# Altium PCB PCB1.PcbDoc
Units mm, origin at the board's own origin, x right, y up, seen from the top; angles counter-clockwise.
Board outline 59.94 x 64.9 mm, 2 copper layers (Top Layer, Bottom Layer); 20 components, 15 nets, 104 pads, 4 vias.
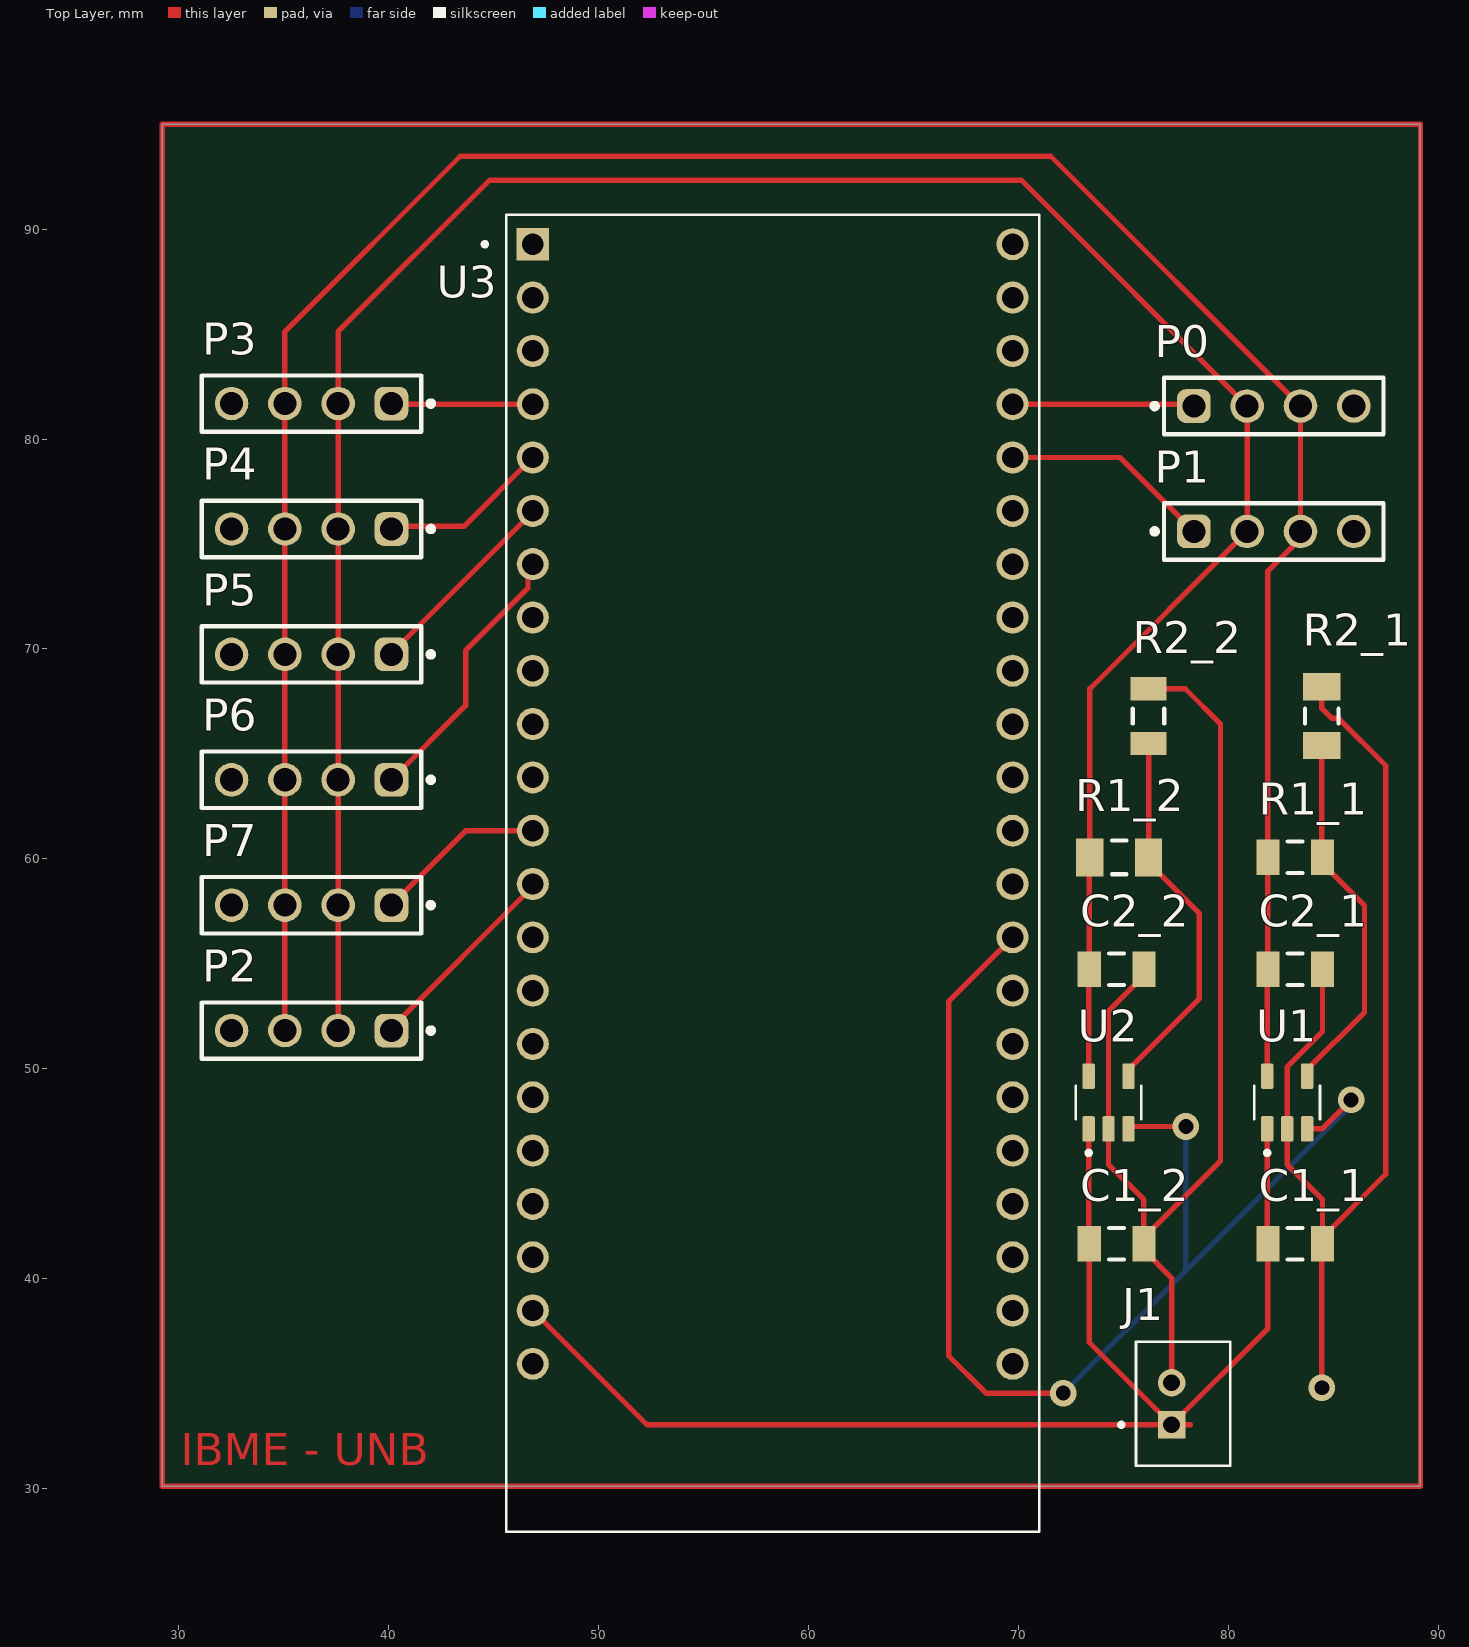
[diagram p0: Top Layer view]
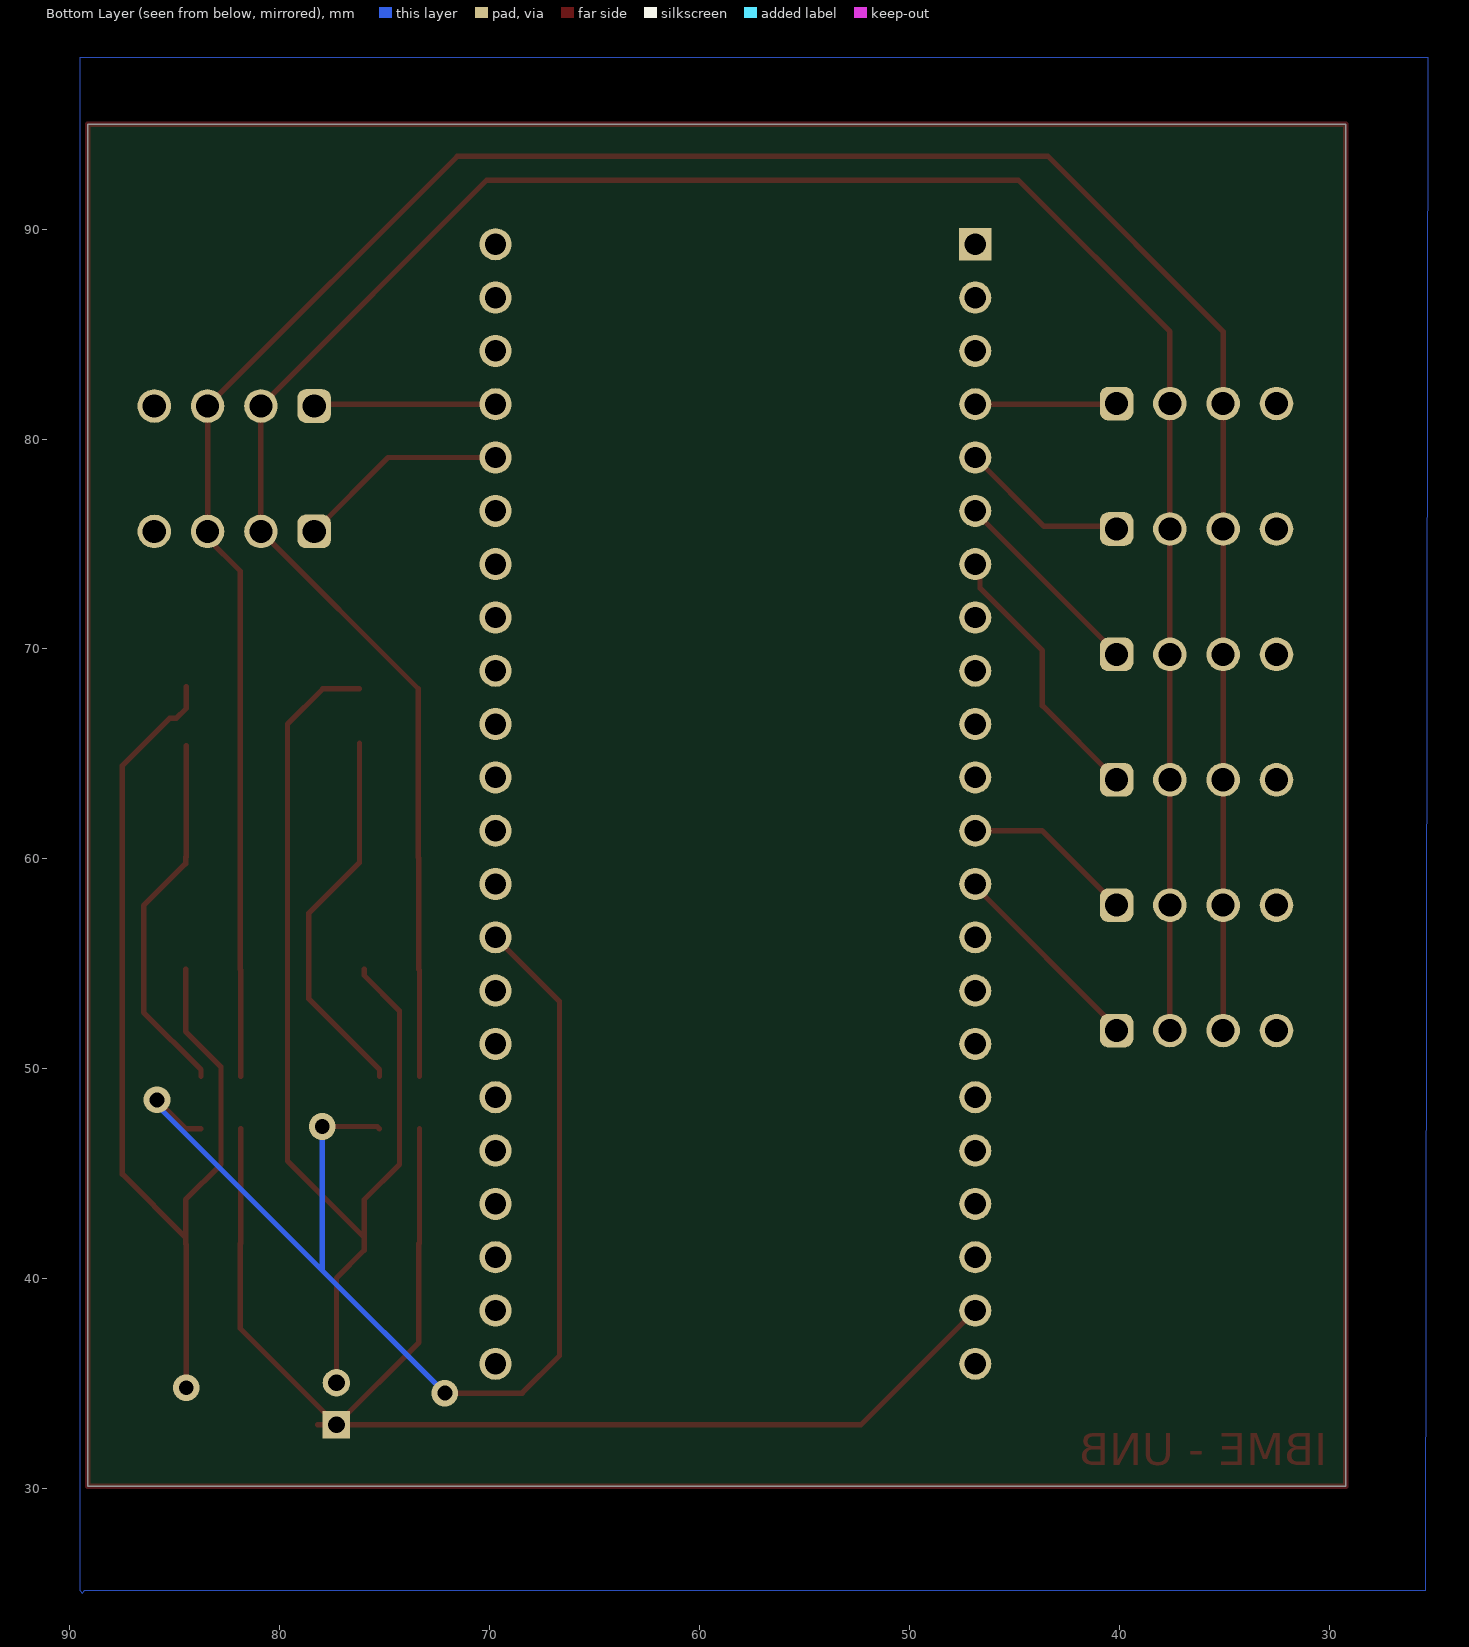
[diagram p1: Bottom Layer view, seen from below]
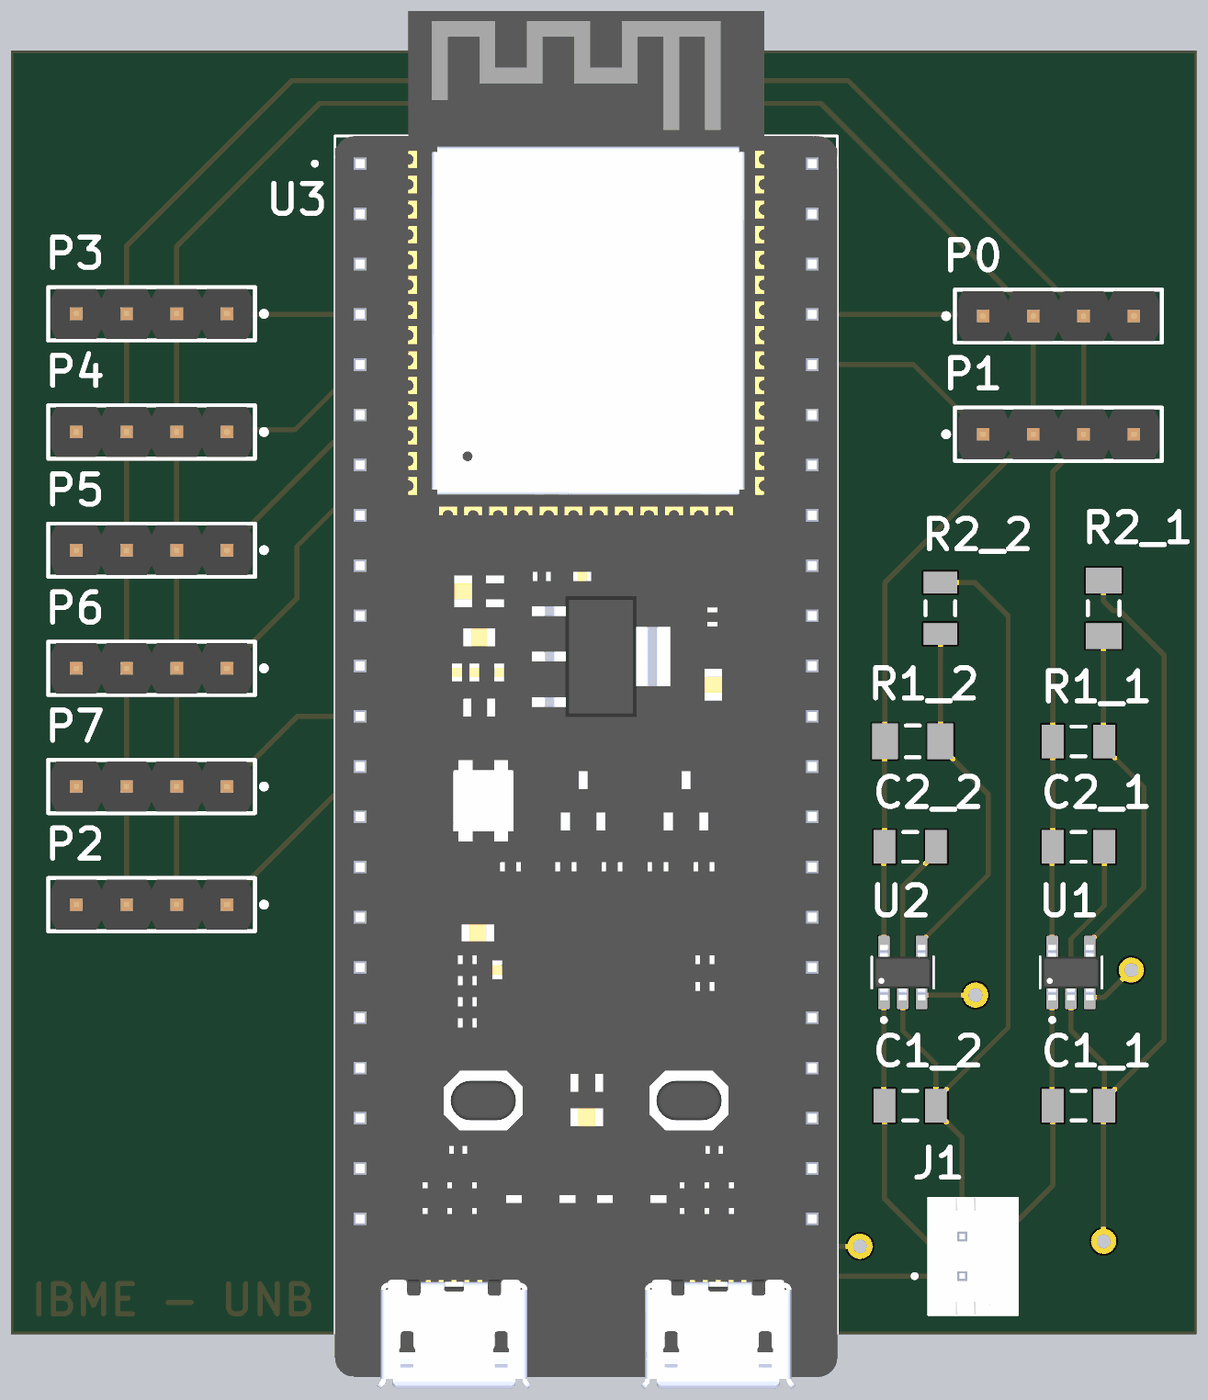
[diagram p2: 3D render of the assembled board from above, using the file's embedded part models]

## Layer stack, top to bottom
Top Solder: solder mask 0.0102, Solder Resist, Dk 3.5
Top Layer: signal copper 0.0356
Dielectric 1: dielectric 0.32, FR-4, Dk 4.8
Bottom Layer: signal copper 0.0356
Bottom Solder: solder mask 0.0102, Solder Resist, Dk 3.5

## Board outline
29.21,30.099 29.21,94.996 89.154,94.996 89.154,30.099

## Design rules (kind name [scope] priority, off if disabled: settings)
Clearance [All] p1: gap=0.254 ignorepadtopadclearanceinfootprint=FALSE
PolygonConnect [All] p1: connectstyle=Relief reliefconductorwidth=0.254 reliefentries=4 polygonreliefangle="90 Angle" airgapwidth=0.254
RoutingVias [All] p1: holewidth=0.711 width=1.27 viastyle="Through Hole" minholewidth=0.711 minwidth=1.27 maxholewidth=0.711 maxwidth=1.27
SolderMaskExpansion [All] p1: expansion=0.102 istentingtop=FALSE
SupplyNets "Schematic Supply Nets_5" [InNet('3.4V')] p1: voltage=0.000
SupplyNets "Schematic Supply Nets_4" [InNet('1.6V')] p2: voltage=0.000
SupplyNets "Schematic Supply Nets_1" [InNet('3.7V')] p3: voltage=0.000
SupplyNets "Schematic Supply Nets" [InNet('GND')] p4: voltage=0.000
Width [All] p1: maxlimit=0.254 minlimit=0.254 preferedwidth=0.254
30 further rules are at their usual default settings.

## Components (designator, comment, footprint, x,y, rotation, side; value= is the part's Value field where it differs from the comment)
C1_1 "1uF" CAPC3216X110X50LL20T25 83.185,41.656 r180 top
C1_2 "1uF" CAPC3216X110X50LL20T25 74.676,41.656 r180 top
C2_1 "1uF" CAPC3216X110X50LL20T25 83.185,54.737 r0 top
C2_2 "1uF" CAPC3216X110X50LL20T25 74.676,54.737 r180 top
J1 "B2B-PH-K-S(LF)(SN)" JST_B2B-PH-K-S(LF)(SN) 77.851,34.036 r270 top
P0 "61300411121" 61300411121 82.169,81.572 r0 top
P1 "61300411121" 61300411121 82.169,75.598 r0 top
P2 "61300411121" 61300411121 36.322,51.816 r180 top
P3 "61300411121" 61300411121 36.322,81.688 r180 top
P4 "61300411121" 61300411121 36.322,75.714 r180 top
P5 "61300411121" 61300411121 36.322,69.739 r180 top
P6 "61300411121" 61300411121 36.322,63.765 r180 top
P7 "61300411121" 61300411121 36.322,57.79 r180 top
R1_1 "62k" RESC3216X70X50LL20T25 83.185,60.071 r180 top
R1_2 "82k" RESC3216X70X50NL20T25 74.803,60.069 r180 top
R2_1 "12k" RESC3216X70X50NL20T25 84.455,66.802 r270 top
R2_2 "43k" RESC3216X70X50LL20T25 76.2,66.802 r270 top
U1 "TLV75801PDBVR" SOT95P280X145-5N 82.804,48.387 r90 top
U2 "TLV75801PDBVR" SOT95P280X145-5N 74.295,48.387 r90 top
U3 "ESP32-S3-DEVKITC-1-N8R2" XCVR_ESP32-S3-DEVKITC-1-N8R2 58.293,59.309 r0 top

## Footprints (in the part's own frame and the unit in brackets; to place one, negate y for a bottom-side part, rotate by r counter-clockwise, add the part's x,y. Pads: shape width x height; smd on the part's side, far side on the other; paste and mask are expansions set on the pad)
61300411121 [mm] "Pin Header, pitch 2.54 mm, THT, Vertical, single row, 4p"
  rrect50% 1.6x1.6 hole 1.1: 1(-3.81,0)
  round 1.6 hole 1.1: 2(-1.27,0) 3(1.27,0) 4(3.81,0)
  silkscreen extent -5.8,-1.35 5.23,1.35, body extent -5.08,-1.27 5.08,1.27, height 8.57
CAPC3216X110X50LL20T25 [mm] "Chip Capacitor, 2-Leads, Body 3.20x1.60mm, IPC High Density"
  rect 1.1x1.7 smd: 1(-1.3,0) 2(1.3,0)
  silkscreen extent -0.35,-0.75 0.35,0.75, body extent -1.7,-0.9 1.7,0.9, height 1.1
JST_B2B-PH-K-S(LF)(SN) [mm]
  rect 1.308x1.308 / inner round 1.308 / far side rect 1.308x1.308 hole 0.8: 1(1,-0.55)
  round 1.308 hole 0.8: 2(-1,-0.55)
  silkscreen extent -2.95,-3.05 2.95,2.25, body extent -2.95,-2.25 2.95,2.25, height 6
RESC3216X70X50LL20T25 [mm] "Chip Resistor, 2-Leads, Body 3.20x1.60mm, IPC High Density"
  rect 1.1x1.7 smd: 1(-1.3,0) 2(1.3,0)
  silkscreen extent -0.35,-0.75 0.35,0.75, body extent -1.7,-0.9 1.7,0.9, height 0.7
RESC3216X70X50NL20T25 [mm] "Chip Resistor, 2-Leads, Body 3.20x1.60mm, IPC Medium Density"
  rect 1.3x1.8 smd: 1(-1.4,0) 2(1.4,0)
  silkscreen extent -0.35,-0.8 0.35,0.8, body extent -1.7,-0.9 1.7,0.9, height 0.7
SOT95P280X145-5N [mm]
  rrect25% 1.21x0.59 smd mask+0.05: 1(-1.255,0.95) 2(-1.255,0) 3(-1.255,-0.95) 4(1.255,-0.95) 5(1.255,0.95)
  silkscreen extent -2.5,-1.57 0.8,1.57, body extent -1.4,-1.45 1.4,1.45, height 1.45
XCVR_ESP32-S3-DEVKITC-1-N8R2 [mm]
  rect 1.53x1.53 / inner round 1.53 / far side rect 1.53x1.53 hole 1.02: J1_1(-11.43,29.97)
  round 1.53 hole 1.02: J1_2(-11.43,27.43) J1_3(-11.43,24.89) J1_4(-11.43,22.35) J1_5(-11.43,19.81) J1_6(-11.43,17.27) J1_7(-11.43,14.73) J1_8(-11.43,12.19) J1_9(-11.43,9.65) J1_10(-11.43,7.11) J1_11(-11.43,4.57) J1_12(-11.43,2.03) J1_13(-11.43,-0.51) J1_14(-11.43,-3.05) J1_15(-11.43,-5.59) J1_16(-11.43,-8.13) J1_17(-11.43,-10.67) J1_18(-11.43,-13.21) J1_19(-11.43,-15.75) J1_20(-11.43,-18.29) J1_21(-11.43,-20.83) J1_22(-11.43,-23.37) J3_1(11.43,29.97) J3_2(11.43,27.43) J3_3(11.43,24.89) J3_4(11.43,22.35) J3_5(11.43,19.81) J3_6(11.43,17.27) J3_7(11.43,14.73) J3_8(11.43,12.19) J3_9(11.43,9.65) J3_10(11.43,7.11) J3_11(11.43,4.57) J3_12(11.43,2.03) J3_13(11.43,-0.51) J3_14(11.43,-3.05) J3_15(11.43,-5.59) J3_16(11.43,-8.13) J3_17(11.43,-10.67) J3_18(11.43,-13.21) J3_19(11.43,-15.75) J3_20(11.43,-18.29) J3_21(11.43,-20.83) J3_22(11.43,-23.37)
  silkscreen extent -13.82,-31.37 12.7,31.37, body extent -12.7,-31.96 12.7,37.68, height 7.39

## Part data
C1_1 C1_2 C2_1 C2_2: library part CMP-2000-06011-1, "Chip Capacitor, 1 uF, +/- 10%, 50 V, -55 to 125 degC, 1206 (3216 Metric), RoHS, Tape and Reel", Capacitance - nF=1000nF, Case Code - in=1206, Case Code - mm=3216, Case Height=1mm, Case Length=3.2mm, Case Width=1.6mm, Dielectric=X7R, Manufacturer=Kemet, Maximum Operating Temperature=+125C, Minimum Operating Temperature=-55C, Operating Temperature Range=-55Cto+125C, Package / Case=1206(3216metric), Package Description="2-Pin Surface Mount Device, Body 3.2 x 1.6 mm", Temperature Coefficient / Code=+/-15%, Tolerance=10%, Voltage Rating=50V, Brand=Kemet, Capacitance=1uF, Class=Class1, Datasheet URL=http://www.kemet.com/docfinder?Partnumber=C1206C105K5RACTU, Datasheet Version=02/2016, Dimensions=1.6mmWx3.2mmLx1mmH, Factory Pack Quantity=2500, Manufacturer URL=http://www.kemet.com/, Mounting Technology=SurfaceMount, Package Reference=1206, Packaging=Reel, Product=GeneralTypeMLCCs, Product Category=MultilayerCeramicCapacitorsMLCC-SMD/SMT, RoHS=Details, Series=C1206C, Termination Style=SMD/SMT, Type=SMDMLCCX7R6.3-250VDCCommericalGrade, Voltage Rating DC=50V
J1: "Connector Header Through Hole 2 position 0.079 (2.00mm)", Package=None, Check_prices=https://www.snapeda.com/parts/B2B-PH-K-S%20(LF)(SN)/JST/view-part/?ref=eda, MF=JST, MP="B2B-PH-K-S (LF)(SN)", SnapEDA_Link=https://www.snapeda.com/parts/B2B-PH-K-S%20(LF)(SN)/JST/view-part/?ref=snap
P0 P1 P2 P3 P4 P5 P6 P7: library part CMP-1502-01064-3, Color=Black, Contact Resistance=20mΩ, Current Rating=3A, Max Operating Temperature=105°C, Min Operating Temperature=-40°C, Operating Supply Voltage=250V, Connector Type="Male Pin", Contact Material=Copper, Contact Mating Length=5.9944mm, Contact Plating=Gold, Gender=Male, Height=8.89mm, Lead Free="Lead Free", Lead Pitch=2.54mm, Mount="Through Hole", NexarPartId=32855522, Number of Contacts=4, Number of Pins=4, Number of Positions=4, Number of Rows=1, Orientation=Vertical, Packaging=Bulk, Pitch=2.54mm, REACH SVHC=Unknown, RoHS=Compliant, Termination=Solder, Voltage Rating=250V
R1_1: library part CMP-2003-04487-1, Manufacturer=Panasonic, Part Number=ERA8AEB623V
R1_2: library part CMP-2003-00009-1, Manufacturer=Panasonic, Part Number=ERA8AEB823V
R2_1: library part CMP-2003-04416-1, Manufacturer=Panasonic, Part Number=ERA8AEB123V
R2_2: library part CMP-2003-04467-1, Manufacturer=Panasonic, Part Number=ERA8AEB433V
U1 U2: "500-mA, low-IQ, high-accuracy, adjustable ultra-low-dropout voltage regulator with enable", Package="SOT-23-5 Texas Instruments", Check_prices=https://www.snapeda.com/parts/TLV75801PDBVR/Texas+Instruments/view-part/?ref=eda, MF="Texas Instruments", MP=TLV75801PDBVR, SnapEDA_Link=https://www.snapeda.com/parts/TLV75801PDBVR/Texas+Instruments/view-part/?ref=snap
U3: "WiFi Development Tools - 802.11 (Engineering Samples Only) ESP32-S3 General-Purpose Development Board, ESP32-S3-WROOM-1-N8R2, with Pin Header", Package=None, Check_prices=https://www.snapeda.com/parts/ESP32-S3-DEVKITC-1-N8R2/Espressif+Systems/view-part/?ref=eda, MF="Espressif Systems", MP=ESP32-S3-DEVKITC-1-N8R2, SnapEDA_Link=https://www.snapeda.com/parts/ESP32-S3-DEVKITC-1-N8R2/Espressif+Systems/view-part/?ref=snap

## Via types
v1: diameter 1.27, hole 0.711, Top Layer to Bottom Layer, 4 vias

## Nets (pads, with @x,y where several pads share a name; then routed paths per layer and width w, separated by ;. In a path a pad name is that pad's centre, name@x,y a point inside that pad or via, vN(x,y) a via of type N, cw(c..) or ccw(c..) an arc to the next point about the centre after c; other vN are vias at no path point)
1.6V: C2_2.2 P0.2 P1.2 P2.2 P3.2 P4.2 P5.2 P6.2 P7.2 R1_2.2 U2.5 | length 119.1
  Top Layer w0.254: P2.2 P7.2 P6.2 P5.2 P4.2 P3.2 37.592,85.117 44.804,92.329 70.142,92.329 P0.2 P1.2 73.403,68.102 R1_2.2 73.376,60.042 C2_2.2 73.345,54.706 U2.5
3.4V: C2_1.1 P0.3 P1.3 P2.3 P3.3 P4.3 P5.3 P6.3 P7.3 R1_1.2 U1.5 | length 122.7
  Top Layer w0.254: P2.3 P7.3 P6.3 P5.3 P4.3 P3.3 35.052,85.117 43.407,93.472 71.539,93.472 P0.3 P1.3 83.439,75.258 81.885,73.704 R1_1.2 C2_1.1 81.854,54.706 U1.5
3.7V: C1_1.2 C1_2.2 J1.1 U1.1 U2.1 U3.J1_21 | length 65.3
  Top Layer w0.254: U3.J1_21 52.306,33.036 78.19,33.036 ; U2.1 73.345,41.687 C1_2.2 73.376,36.961 J1.1 81.885,37.62 C1_1.2 81.854,41.687 U1.1
ADC_0: P0.1 U3.J3_4 | length 8.7
  Top Layer w0.254: U3.J3_4 78.272,81.659 P0.1
ADC_1: P1.1 U3.J3_5 | length 10.1
  Top Layer w0.254: U3.J3_5 74.838,79.119 P1.1
ADC_2: P2.1 U3.J1_13 | length 9.8
  Top Layer w0.254: P2.1 40.132,51.942 46.863,58.673 U3.J1_13
ADC_3: P3.1 U3.J1_4 | length 6.7
  Top Layer w0.254: P3.1 40.161,81.659 U3.J1_4
ADC_4: P4.1 U3.J1_5 | length 8.1
  Top Layer w0.254: P4.1 40.259,75.841 43.585,75.841 U3.J1_5
ADC_5: P5.1 U3.J1_6 | length 9.6
  Top Layer w0.254: P5.1 40.132,69.794 46.863,76.525 U3.J1_6
ADC_6: P6.1 U3.J1_7 | length 13.2
  Top Layer w0.254: P6.1@40.132,63.822 P6.1 43.665,67.298 43.665,69.921 46.636,72.893 46.636,73.812 U3.J1_7 U3.J1_7@46.863,73.982
ADC_7: P7.1 U3.J1_12 | length 8.2
  Top Layer w0.254: P7.1 43.681,61.339 U3.J1_12
Enable: U1.3 U2.3 U3.J3_14 | length 59.4
  Top Layer w0.254: U3.J3_14 66.675,53.211 66.675,36.322 68.453,34.544 v1(72.136,34.544) ; U2.3 75.357,47.244 v1(77.978,47.244) ; U1.3 84.47,47.132 v1(85.852,48.514)
  Bottom Layer w0.254: v1(72.136,34.544) 77.978,40.386 ; v1(77.978,47.244) 77.978,40.386 ; v1(85.852,48.514) 85.852,48.26 77.978,40.386
FB_1: R1_1.1 R2_1.2 U1.4 | length 17.7
  Top Layer w0.254: U1.4 83.754,49.952 86.487,52.685 86.487,57.769 84.485,59.771 R1_1.1 84.455,60.101 R2_1.2
FB_2: R1_2.1 R2_2.2 U2.4 | length 18.3
  Top Layer w0.254: U2.4 75.245,49.952 78.613,53.32 78.613,57.409 76.203,59.819 R1_2.1 76.203,65.499 R2_2.2
GND: C1_1.1 C1_2.1 C2_1.2 C2_2.1 J1.2 P0.4 P1.4 P2.4 P3.4 P4.4 P5.4 P6.4 P7.4 R2_1.1 R2_2.1 U1.2 U2.2 U3.J1_22 U3.J3_1 U3.J3_21 U3.J3_22 | length 102
  Top Layer w0.254: C2_2.1 75.976,54.437 74.295,52.756 U2.2 74.295,45.441 75.976,43.76 C1_2.1@75.976,41.956 ; R2_2.1 77.948,68.102 79.629,66.421 79.629,45.609 C1_2.1@75.976,41.956 ; J1.2 77.301,40.031 75.976,41.356 C1_2.1 C1_2.1@75.976,41.956 ; v1(84.455,34.798) 84.455,41.626 C1_1.1 C1_1.1@84.485,41.956 ; R2_1.1 84.455,67.171 84.936,66.69 85.255,66.69 87.503,64.443 87.503,44.974 C1_1.1@84.485,41.956 ; C2_1.2 84.485,51.769 82.804,50.088 U1.2 82.804,45.441 84.485,43.76 C1_1.1@84.485,41.956
pads on no net: U3.J1_1 U3.J1_2 U3.J1_3 U3.J1_8 U3.J1_9 U3.J1_10 U3.J1_11 U3.J1_14 U3.J1_15 U3.J1_16 U3.J1_17 U3.J1_18 U3.J1_19 U3.J1_20 U3.J3_2 U3.J3_3 U3.J3_6 U3.J3_7 U3.J3_8 U3.J3_9 U3.J3_10 U3.J3_11 U3.J3_12 U3.J3_13 U3.J3_15 U3.J3_16 U3.J3_17 U3.J3_18 U3.J3_19 U3.J3_20
copper on no net: | length 249.7
  Top Layer w0.254: 29.21,30.099 89.154,30.099 89.154,94.996 29.21,94.996 29.21,30.099

## Polygon pours and split planes (outlines as drawn)
GND on Bottom Layer "NONET_L02_P002" (solid, shelved, pour order 2): 25.273,98.171 89.535,98.171 89.535,25.146 89.408,25.019 89.281,25.146 25.4,25.146

## Other copper
Top Layer:
  text "IBME - UNB" at 30.099,31.115 h1.52